# Altium PCB WatchX.PcbDoc
Units mil, origin at the board's own origin, x right, y up, seen from the top; angles counter-clockwise.
Board outline 1113.03 x 1633.03 mil, 2 copper layers (Top Layer, Bottom Layer); 65 components, 48 nets, 268 pads, 61 vias.
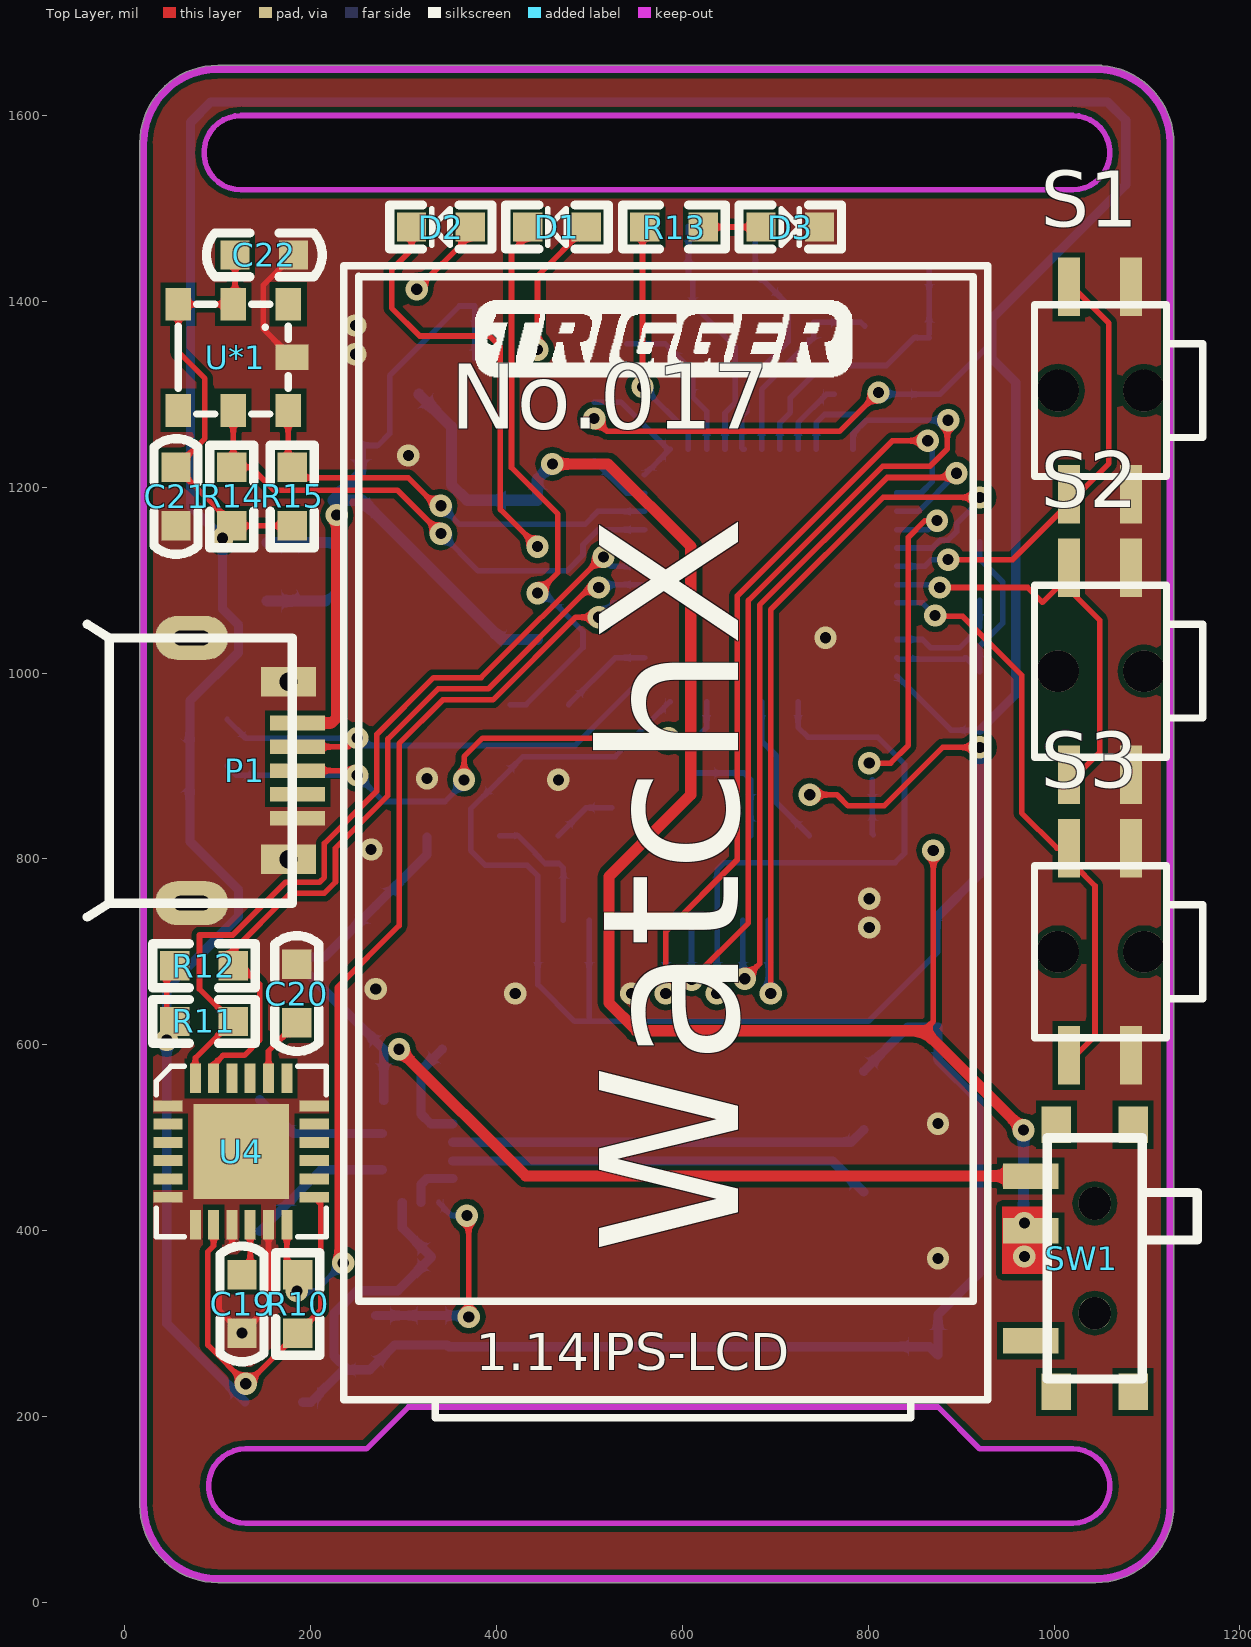
[diagram p0: Top Layer view]
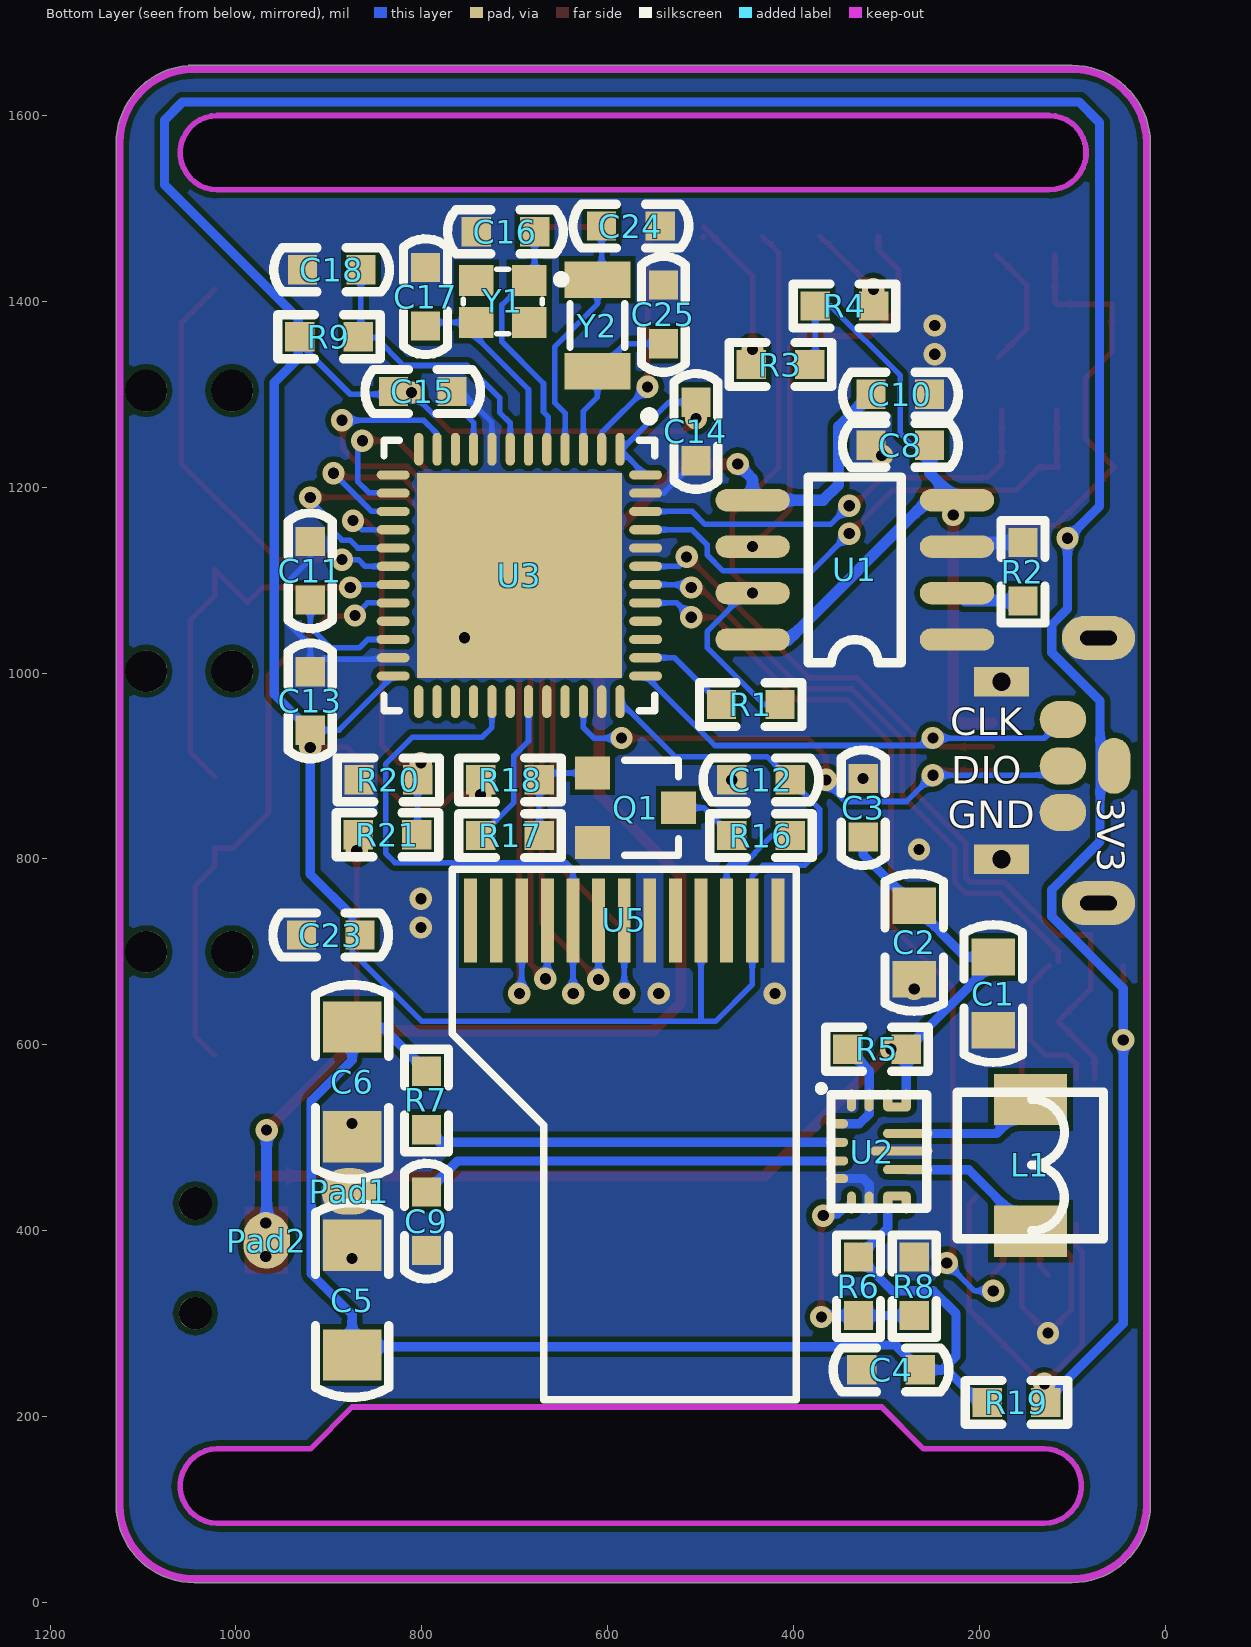
[diagram p1: Bottom Layer view, seen from below]
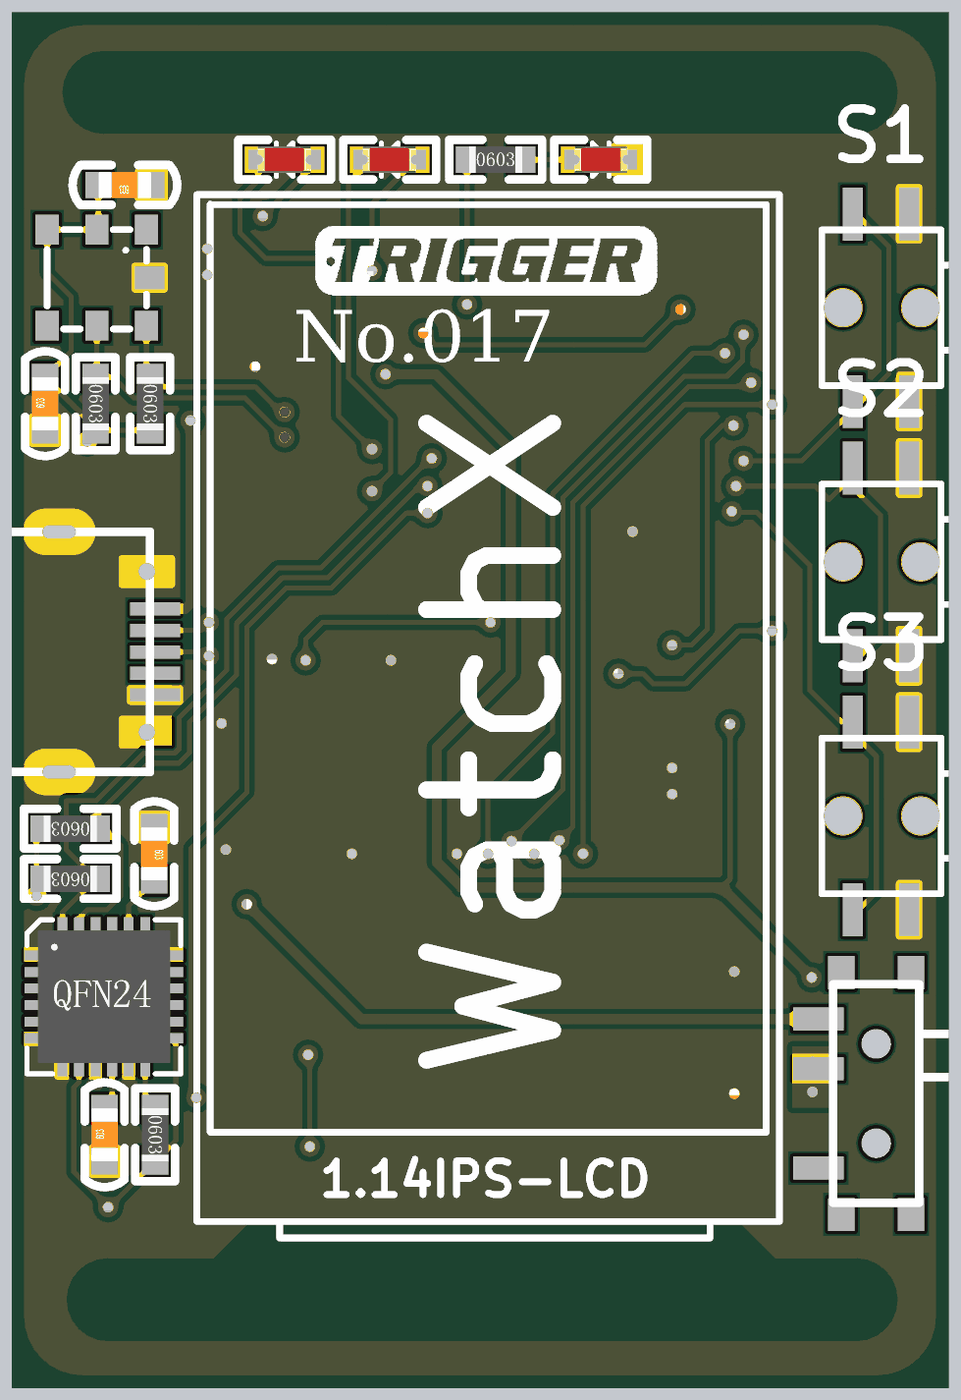
[diagram p2: 3D render of the assembled board from above, using the file's embedded part models]
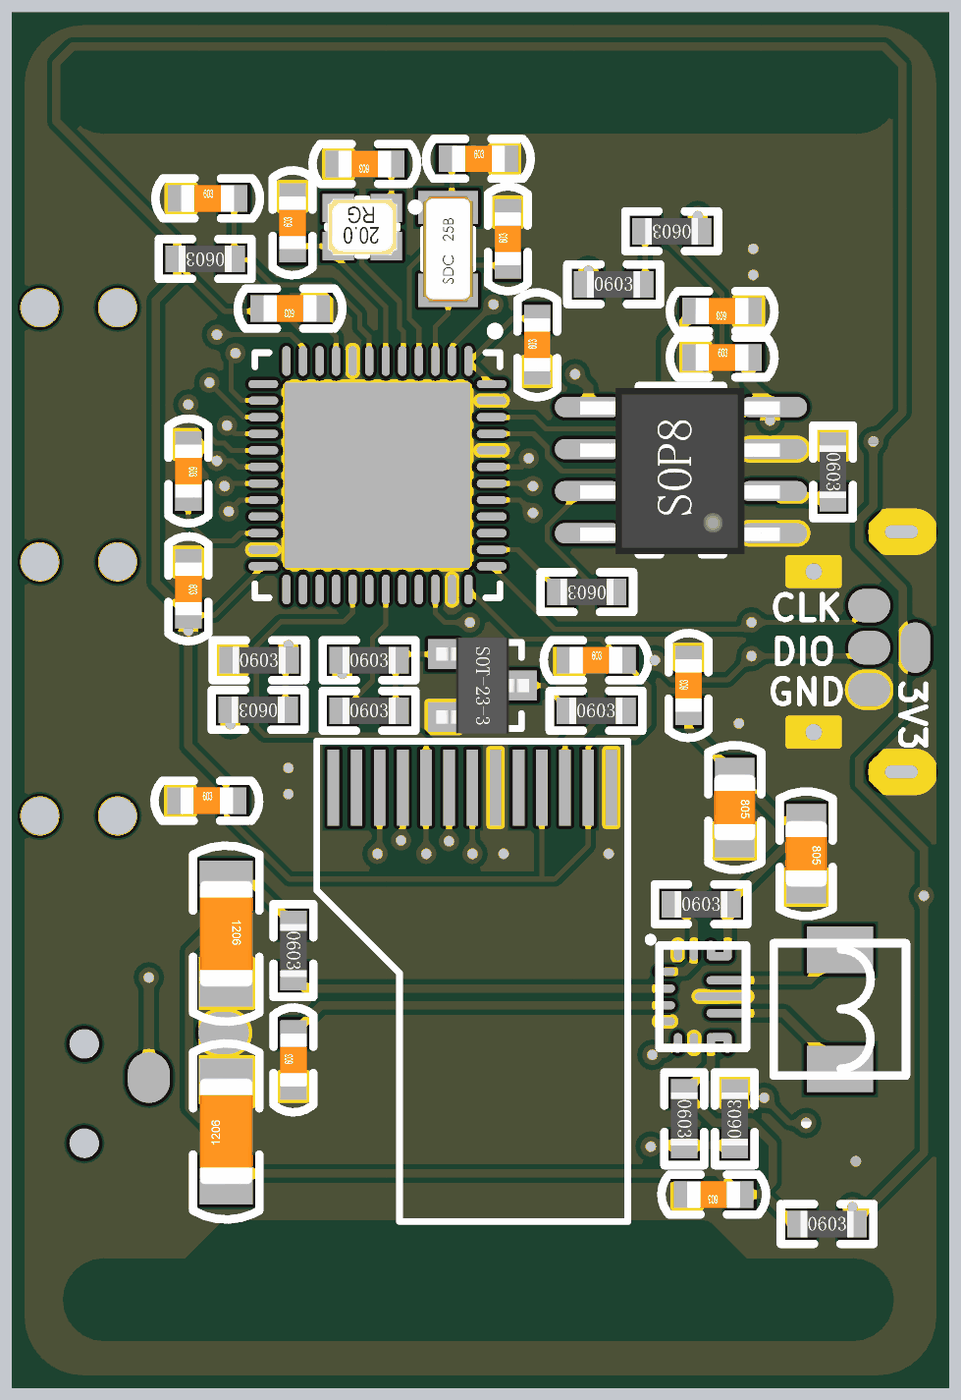
[diagram p3: 3D render of the assembled board from below, using the file's embedded part models]

## Layer stack, top to bottom
Top Solder: solder mask 0.4, Solder Resist, Dk 3.5
Top Layer: signal copper 1.4
Dielectric 1: dielectric 12.6, FR-4, Dk 4.8
Bottom Layer: signal copper 1.4
Bottom Solder: solder mask 0.4, Solder Resist, Dk 3.5

## Board outline
15.98,105 ccw(c100,105) 100,20.98 1045,20.98 ccw(c1045,105) 1129.02,105 1129.02,1575 ccw(c1125,1575) 1128.77,1576.37 ccw(c1045,1570) 1051.37,1653.77 ccw(c1050,1650) 1050,1654.01 100,1654.01 ccw(c100,1570) 15.98,1570
cut-out: 130,85 cw(c130,125) 130,165 260,165 305,210 875,210 920,165 1020,165 cw(c1020,125) 1020,85
cut-out: 125,1520 1020,1520 ccw(c1020,1560) 1020,1600 125,1600 ccw(c125,1560)
cut-out: 125,1520 1020,1520 ccw(c1020,1560) 1020,1600 125,1600 ccw(c125,1560)
cut-out: 130,85 cw(c130,125) 130,165 260,165 305,210 875,210 920,165 1020,165 cw(c1020,125) 1020,85

## Design rules (kind name [scope] priority, off if disabled: settings)
Clearance [All] p1: gap=6
ComponentClearance [All] p1 off: gap=10 collisioncheckmode=3 verticalgap=10 showdistances=FALSE
HoleSize [All] p1 off: absolutevalues=TRUE maxlimit=100 minlimit=1 maxpercent=80.000 minpercent=20.000
HoleToHoleClearance [All] p1 off: gap=10 allowstackedmicrovias=TRUE
LayerPairs [All] p1 off: enforce=TRUE
MinimumSolderMaskSliver [All] p1 off: minsoldermaskwidth=10
NetAntennae [All] p1 off: netantennaetolerance=0
PlaneConnect [All] p1: planeconnectstyle=Direct reliefexpansion=20 reliefentries=4 reliefconductorwidth=10 reliefairgap=10
PolygonConnect [All] p1: connectstyle=Direct reliefconductorwidth=10 reliefentries=4 polygonreliefangle="90 Angle" airgapwidth=10
RoutingVias [All] p1: holewidth=12 width=24 viastyle="Through Hole" minholewidth=12 minwidth=24 maxholewidth=12 maxwidth=24
SilkToSilkClearance [All] p1 off: silktosilkclearance=10
SilkToSolderMaskClearance [IsPad] p1 off: minsilkscreentomaskgap=10 clearancetoexposedcopper=TRUE
SolderMaskExpansion [All] p1: expansion=4
Width [All] p1: maxlimit=100 minlimit=6 preferedwidth=10
21 further rules are at their usual default settings.

## Components (designator, comment, footprint, x,y, rotation, side; value= is the part's Value field where it differs from the comment)
C1 "106" 电容_C0805 185,655 r270 bottom
C2 "106" 电容_C0805 270,710 r270 bottom
C3 "106" 电容_C0603 325,855 r90 bottom
C4 "106" 电容_C0603 295,250 r0 bottom
C5 "22uf" 电容_C1206 875,325 r90 bottom
C6 "22uf" 电容_C1206 875,560 r270 bottom
C8 "10uf" 电容_C0603 285,1245 r180 bottom
C9 "104" 电容_C0603 795,410 r90 bottom
C10 "10uf" 电容_C0603 285,1300 r0 bottom
C11 "4.7uF" 电容_C0603 920,1110 r270 bottom
C12 "1uF" 电容_C0603 435,885 r180 bottom
C13 "1uF" 电容_C0603 920,970 r270 bottom
C14 "1uF" 电容_C0603 505,1260 r90 bottom
C15 "1uF" 电容_C0603 799,1303 r0 bottom
C16 "22pf" 电容_C0603 710,1475 r0 bottom
C17 "22pf" 电容_C0603 796,1405 r90 bottom
C18 "104" 电容_C0603 897,1434 r180 bottom
C19 "104" 电容_C0603 126,321 r90 top
C20 "2.2nF" 电容_C0603 185,655 r270 top
C21 "4.7uf" 电容_C0603 55,1190 r90 top
C22 "104" 电容_C0603 150,1450 r180 top
C23 "105" 电容_C0603 898,718 r180 bottom
C24 "22pf" 电容_C0603 575,1481 r180 bottom
C25 "22pf" 电容_C0603 540,1386 r90 bottom
D1 "red" LED_0603 465,1480 r180 top
D2 "green" LED_0603 340,1480 r180 top
D3 "red" LED_0603 716,1480 r0 top
L1 "1.5uH" 变压器电感_0420 145,470 r0 bottom
P1 "MICRO USB" "接插件_MICRO 牛角插座 USB 卷边" 180,895 r90 top
Pad1 "GND" Pad_A 878,442 r180 bottom
Pad2 "BAT" Pad_A 967,389 r90 bottom
Q1 "S8050" 三极管_SOT-23 570,855 r270 bottom
R1 "2k" 电阻_R0603 446,966 r0 bottom
R2 "1.2k" 电阻_R0603 153,1109 r270 bottom
R3 "2k" 电阻_R0603 414,1332 r180 bottom
R4 "2k" 电阻_R0603 345,1395 r0 bottom
R5 "10K" 电阻_R0603 310,595 r180 bottom
R6 "470K" 电阻_R0603 330,340 r270 bottom
R7 "100k" 电阻_R0603 795,540 r270 bottom
R8 "150K" 电阻_R0603 270,340 r90 bottom
R9 "10K" 电阻_R0603 900,1362 r0 bottom
R10 "10K" 电阻_R0603 186,321 r270 top
R11 "10K" 电阻_R0603 85,625 r180 top
R12 "10K" 电阻_R0603 85,685 r180 top
R13 "1K" 电阻_R0603 591,1480 r0 top
R14 "4.7K" 电阻_R0603 115,1190 r270 top
R15 "4.7K" 电阻_R0603 180,1190 r270 top
R16 "10R" 电阻_R0603 435,825 r180 bottom
R17 "1K" 电阻_R0603 705,825 r180 bottom
R18 "10K" 电阻_R0603 705,885 r180 bottom
R19 "1R" 电阻_R0603 160,215 r180 bottom
R20 "10k" 电阻_R0603 836,885 r180 bottom
R21 "10k" 电阻_R0603 837,826 r0 bottom
S1 "SW-PB" KEY_3.5*4.7 1018,1304 r90 top
S2 "SW-PB" KEY_3.5*4.7 1018,1002 r90 top
S3 "SW-PB" KEY_3.5*4.7 1018,700 r90 top
SW1 "SPDT" MSS3-Q-T/R 1030,370 r90 top
U1 "TP4056" SOP8 225,1035 r0 bottom
U2 "TPS63070" VQFN-15-HR 315,485 r180 bottom
U3 "STM32F401CCU6" STM-UFQFPN48_N 695,1105 r270 bottom
U4 "MPU-6050" 陀螺仪_QFN24 125,485 r0 top
U5 "IPS-LCD" 1.14IPS-LCD -95,470 r270 top locked
U*1 "BMP180" LGA-7 215,1200 r0 top
Y1 "XTAL" 晶振_2016 713,1400 r0 bottom
Y2 "32.768K" 晶振_3215 611,1374 r90 bottom

## Footprints (in the part's own frame and the unit in brackets; to place one, negate y for a bottom-side part, rotate by r counter-clockwise, add the part's x,y. Pads: shape width x height; smd on the part's side, far side on the other; paste and mask are expansions set on the pad)
1.14IPS-LCD [mm] "1.14寸IPS-LCD裸屏SPI接口"
  rect 2.3x0.35 smd far side: 1(-6.7,21.4) 2(-6.7,20.7) 3(-6.7,20) 4(-6.7,19.3) 5(-6.7,18.6) 6(-6.7,17.9) 7(-6.7,17.2) 8(-6.7,16.5) 9(-6.7,15.8) 10(-6.7,15.1) 11(-6.7,14.4) 12(-6.7,13.7) 13(-6.7,13)
  silkscreen extent -24.6,8.4 6.9,26
KEY_3.5*4.7 [mil]
  round 45 hole 45: 0(0,13.78) 0(0,-78.74)
  rect 62.99x23.62 smd: 1(-111.5,-64.98) 1(111.5,-64.98) 2(-111.5,2.02) 2(111.5,2.02)
  silkscreen extent -92,-142 92,39, body extent -116,-142 117,35, height 64
LED_0603 [mm]
  rect 0.8x0.8 smd paste-0.1: A(-0.8,0) K(0.8,0)
  silkscreen extent -1.4,-0.6 1.4,0.6, body extent -0.8,-0.4 0.82,0.4, height 0.6
LGA-7 [mm] "LGA-7Pin"
  rect 0.7x0.9 smd: 1(-1,5) 2(-2.5,5) 3(-4,5) 4(-4,2.1) 5(-2.5,2.1) 6(-1,2.1)
  rect 0.9x0.7 smd: 7(-0.9,3.55)
  silkscreen extent -4,2 -1,5
MSS3-Q-T/R [mm] "贴片开关-两档"
  rect 1x0.8 smd: 0(-3.65,-1.4) 0(-3.65,0.7) 0(3.65,-1.4) 0(3.65,0.7)
  rect 0.7x1.524 smd: 1(-2.25,1.4) 2(0.75,1.4) 3(2.25,1.4)
  round 0.9 hole 0.9 unplated: ""(-1.5,-0.35) ""(1.5,-0.35)
  silkscreen extent -3.3,-3.15 3.3,0.95
Pad_A [mil]
  oval 60x50 smd: 1(0,0)
SOP8 [mil]
  oval 80x24 smd: 1(-1,-1) 2(-1,-51) 3(-1,-101) 4(-1,-151) 5(219,-151) 6(219,-101) 7(219,-51) 8(219,-1)
  silkscreen extent 59,-176 159,24, body extent -9,-174 229,24, height 63
STM-UFQFPN48_N [mm] "QFN, 48-Leads, Body 7.1x7.1mm, Pitch 0.5mm, Thermal Pad 5.6x5.6mm, IPC Medium Density"
  oval 0.9x0.25 smd: 1(-3.45,2.75) 2(-3.45,2.25) 3(-3.45,1.75) 4(-3.45,1.25) 5(-3.45,0.75) 6(-3.45,0.25) 7(-3.45,-0.25) 8(-3.45,-0.75) 9(-3.45,-1.25) 10(-3.45,-1.75) 11(-3.45,-2.25) 12(-3.45,-2.75) 25(3.45,-2.75) 26(3.45,-2.25) 27(3.45,-1.75) 28(3.45,-1.25) 29(3.45,-0.75) 30(3.45,-0.25) 31(3.45,0.25) 32(3.45,0.75) 33(3.45,1.25) 34(3.45,1.75) 35(3.45,2.25) 36(3.45,2.75)
  oval 0.25x0.9 smd: 13(-2.75,-3.45) 14(-2.25,-3.45) 15(-1.75,-3.45) 16(-1.25,-3.45) 17(-0.75,-3.45) 18(-0.25,-3.45) 19(0.25,-3.45) 20(0.75,-3.45) 21(1.25,-3.45) 22(1.75,-3.45) 23(2.25,-3.45) 24(2.75,-3.45) 37(2.75,3.45) 38(2.25,3.45) 39(1.75,3.45) 40(1.25,3.45) 41(0.75,3.45) 42(0.25,3.45) 43(-0.25,3.45) 44(-0.75,3.45) 45(-1.25,3.45) 46(-1.75,3.45) 47(-2.25,3.45) 48(-2.75,3.45)
  rect 5.6x5.6 smd: 49(0,0)
  silkscreen extent -4.47,-3.7 3.7,3.7, body extent -3.55,-3.55 3.55,3.55, height 0.6
VQFN-15-HR [mm] "VQFN"
  oval 0.599x0.25 smd: 1(-0.964,0.759) 2(-0.964,0.251) 3(-0.964,-0.257) 4(-0.964,-0.739)
  oval 0.25x0.599 smd: 5(-0.573,-1.394) 6(-0.09,-1.394) 7(0.418,-1.394) 7(0.926,-1.394) 12(0.418,1.394) 12(0.926,1.394) 14(-0.09,1.394) 15(-0.573,1.394)
  oval 0.75x0.25 smd: 7(0.672,-1.217) 12(0.679,1.222)
  oval 1.349x0.25 smd: 9(0.964,-0.495) 11(0.964,0.495)
  oval 1.7x0.25 smd: 10(0.789,0.013)
  silkscreen extent -1.45,-1.55 1.48,1.78
三极管_SOT-23 [mm]
  rect 0.9x0.95 smd: 1(-0.95,-1.175) 2(0,1.175) 3(0.95,-1.175)
  silkscreen extent -1.3,-0.3 1.3,1.18, body extent -1.45,-1.4 1.45,1.4, height 1.2
变压器电感_0420 [mm]
  rect 2x1.4 smd: 1(0,-1.8) 2(0,1.8)
  silkscreen extent -2,-2 2,2
"接插件_MICRO 牛角插座 USB 卷边" [mm]
  oval 1.2x2 hole 0.4 slot 1 at 90 deg: 0(-3.625,2.75) 0(3.625,2.75)
  rect 0.8x1.5 hole 0.5: 0(-2.425,0.1) 0(2.425,0.1)
  rect 0.4x1.5 smd: 1(1.3,-0.15) 2(0.65,-0.15) 3(0,-0.15) 4(-0.65,-0.15) 5(-1.3,-0.15)
  silkscreen extent -4,0 4,5.6
晶振_2016 [mm]
  rect 0.95x0.85 smd: 0(-0.725,0.575) 0(0.725,-0.575) 1(-0.725,-0.575) 2(0.725,0.575)
  silkscreen extent -1.7,-0.88 1.08,0.88, body extent -1.05,-0.85 1.05,0.85, height 0.56
晶振_3215 [mm] "XTAL SMD 3.2 x 1.5 mm"
  rect 1x1.8 smd: 1(-1.25,0) 2(1.25,0)
  silkscreen extent -0.6,-0.75 0.6,0.75, body extent -1.6,-0.75 1.6,0.75, height 0.81
电容_C0603 [mm]
  rect 0.8x0.8 smd: 1(-0.8,0) 2(0.8,0)
  silkscreen extent -1.58,-0.6 1.58,0.6, body extent -0.8,-0.4 0.8,0.4, height 0.3
电容_C0805 [mm]
  rect 1x1.2 smd: 1(-1,0) 2(1,0)
  silkscreen extent -1.88,-0.8 1.88,0.8, body extent -1,-0.62 1,0.63, height 0.77
电容_C1206 [mm]
  rect 1.4x1.6 smd: 1(-1.5,0) 2(1.5,0)
  silkscreen extent -2.66,-1 2.66,1, body extent -1.6,-0.8 1.6,0.8, height 1
电阻_R0603 [mm]
  rect 0.8x0.8 smd: 1(-0.8,0) 2(0.8,0)
  silkscreen extent -1.4,-0.6 1.4,0.6, body extent -0.8,-0.4 0.8,0.4, height 0.45
陀螺仪_QFN24 [mm]
  rect 2.6x2.6 smd: 0(0.005,0)
  rect 0.8x0.3 smd: 1(-2,1.25) 2(-2,0.75) 3(-2,0.25) 4(-2,-0.25) 5(-2,-0.75) 6(-2,-1.25) 13(2,-1.25) 14(2,-0.75) 15(2,-0.25) 16(2,0.25) 17(2,0.75) 18(2,1.25)
  rect 0.3x0.8 smd: 7(-1.25,-2) 8(-0.75,-2) 9(-0.25,-2) 10(0.25,-2) 11(0.75,-2) 12(1.25,-2) 19(1.25,2) 20(0.75,2) 21(0.25,2) 22(-0.25,2) 23(-0.75,2) 24(-1.25,2)
  silkscreen extent -2.32,-2.32 2.32,2.32, body extent -2,-2 2.01,2, height 0.9

## Part data
C1 C2 C3 C4 C5 C6 C8 C9 C10 C11 C12 C13 C14 C15 C16 C17 C18 C19 C20 C21 C22 C23 C24 C25: library part cap
D1 D2 D3: library part LED
L1: library part "Inductor Iron 2"
P1: library part "MICRO USB 5PIN"
Pad1 Pad2: library part Pad
Q1: library part Triode-NPN
R1 R2 R3 R4 R5 R6 R7 R8 R9 R10 R11 R12 R13 R14 R15 R16 R17 R18 R19 R20 R21: library part Res
S1 S2 S3: "按键"
SW1: library part SW_SPDT, "开关-两档"
U2: "降压-升压转换器"
U3: "ARM Cortex-M4 32-bit MCU+FPU, 105 DMIPS, 256 kB Flash, 64 kB Internal RAM, 36 I/Os, 48-pin UFQFPN, -40 to 85 degC, Tray"
U5: library part IPS-LCD-1.14, "IPS-LCD-1.14寸裸屏spi接口"
U*1: "数字气压传感器"
Y2: library part XTAL_A

## Free pads (board coordinates)
  oval 50x40 smd far side: 2(110,950) 3(110,900) 4(110,850)
  oval 35x60 smd far side: 5(55,900)

## Via types
v1: diameter 24, hole 12, Top Layer to Bottom Layer, tented both sides, 61 vias

## Nets (pads, with @x,y where several pads share a name; then routed paths per layer and width w, separated by ;. In a path a pad name is that pad's centre, name@x,y a point inside that pad or via, vN(x,y) a via of type N, cw(c..) or ccw(c..) an arc to the next point about the centre after c; other vN are vias at no path point)
3V3: C12.2 C13.2 C14.2 C15.2 C21.2 C22.2 C23.2 pad.5 R9.2 R10.2 R11.2 R12.2 R14.2 R15.2 R18.1 R19.2 U3.1 U3.9 U3.24 U3.36 U3.48 U4.8 U4.13 U5.10 U5.12 U*1.2 U*1.3 | length 6597.2
  Top Layer w6: 45,641.5 R12.2@45,685 ; U4.8 95.47,383.47 89.25,377.25 89.25,276.75 131,235 131.5,235 R10.2 210.75,314.25 210.75,428.78 U4.13 ; C22.2 118.5,1398.78 U*1.2 U*1.3 57.52,1345.48 86,1317 86,1252.5 C21.2 115,1161.5 R14.2 R15.2 ; v1(505,1274) 519,1260 769,1260 v1(811,1302) ; v1(737,869) 766.3,869 778.3,857 817,857 880,920 v1(920,920)
  Bottom Layer w6: U5.10 499.49,625.49 499,625 ; C14.2 533.81,1291.5 584.47,1240.83 U3.1 U3.48 ; U3.36 527.56,910 428.5,910 C12.2 372,853.5 372,809 388,793 433,793 444.37,781.63 U5.12 444.37,664.63 484,625 499,625 ; U3.9 744.21,1269.46 753,1278.25 787.25,1278.25 809,1300 877,1300 R9.2@933,1356 ; U3.24 889.06,938.5 C13.2 ; 875,738.5 875,700 800,625 499,625
  Bottom Layer w10: R19.2@129.25,215.75 45,300 v1(45,605) 45,660.84 122.1,737.94 122.1,766.62 70,818.73 70,970 122.1,1022.1 122.1,1052.06 105,1069.16 v1(105,1145) 70.53,1179.47 70.53,1592.53 92.47,1614.47 1057.53,1614.47 1077,1595 1077,1525.5 933,1381.5 933,1338.5 958.75,1312.75 958.75,977.25 C13.2 ; 875,738.5 920,783.5 v1(920,920)
  other v1: 130,235
BAT: C10.2 Pad2.1 R21.2 SW1.2 U1.5 | length 1790.8
  Top Layer w6: 860,615 870,625 v1(870,809)
  Top Layer w12: v1(460,1225) 520,1225 609,1136 609,869 521,781 521,645.06 550,616.06 550,615 860,615 v1(967,508)
  Bottom Layer w12: C10.2 351.5,1265 351.5,1202.5 368,1186 U1.5 444,1209 v1(460,1225) ; Pad2.1 v1(967,508)
  other v1: 968,372 968,408
BAT_CHG: R1.2 U3.38 | length 102.6
  Bottom Layer w6: R1.2 527.91,1016.42 U3.38
BAT_DET: R20.2 R21.1 U3.16 | length 419
  Top Layer w6: v1(801,903) 824,903 843,922 843,1146 861,1164 v1(874,1164)
  Bottom Layer w6: R20.2 804.5,827 R21.1 ; U3.16 864.21,1154.21 v1(874,1164)
BAT_SW: C1.1 C2.1 C3.1 R5.2 SW1.3 U2.12 | length 1134.3
  Top Layer w12: v1(295,595) 431.42,458.58 SW1.3
  Bottom Layer w10: U2.12@278.55,539.9 278.5,539.95 R5.2 185,688.5 C1.1 215,694.37 C2.1 325,804.37 C3.1
BMP180_SCL: R14.1 U3.45 U*1.5 | length 569.7
  Top Layer w6: U*1.5 116.57,1223.07 R14.1 135.78,1221.5 160.52,1196.75 293.25,1196.75 v1@335,1155
  Bottom Layer w6: v1(340,1150) 380,1110 475.7,1110 493,1127.3 493,1138 509.21,1154.21 U3.45
BMP180_SDA: R15.1 U3.46 U*1.6 | length 461.3
  Top Layer w6: U*1.6 175.63,1225.87 R15.1 191.5,1210 305,1210 v1@330,1185
  Bottom Layer w6: v1(340,1180) 360,1160 495,1160 508.9,1173.9 U3.46
CPOUT: C20.2 U4.20 | length 72.4
  Top Layer w6: U4.20 154.53,593.03 C20.2
GND: C1.2 C2.2 C3.2 C4.2 C5.2 C6.2 C8.1 C9.1 C10.1 C11.1 C12.1 C13.1 C14.1 C15.1 C16.2 C17.2 C18.1 C19.1 C20.1 C21.1 C22.1 C23.1 C24.2 C25.2 D3.K P1.0 P1.5 Pad1.1 pad.4 Q1.3 R2.1 R8.2 R20.1 S1.1 S2.1 S3.1 U1.1 U1.3 U2.4 U2.6 U2.10 U2.15 U3.8 U3.23 U3.35 U3.44 U3.47 U3.49 U4.0 U4.1 U4.6 U4.7 U4.9 U4.11 U4.18 U5.8 U5.13 U*1.7 | length 933
  Top Layer w6: U4.9 115.16,385.88 101.25,371.97 101.25,314.25 v1(126,289.5) 154.53,318.03 U4.11 ; U*1.7 149,1370.33 149,1417.5 C22.1
  Bottom Layer w6: U1.3@219.5,1140.5 U1.3 ; C14.1 539.92,1193.58 U3.47 ; U3.8 724.53,1269.53 755,1300 C15.1@763.5,1300 ; U3.23 832.24,1015 902.97,1015 904.39,1016.42 905.08,1016.42 C13.1 920,1029.01 944.75,1053.76 944.75,1097.98 920,1122.73 C11.1
  Bottom Layer w10: U2.6 318.55,449.55 324.9,455.9 U2.4
  Bottom Layer w12: R2.1 U1.3@219.5,1140.5
  other v1: 875,370 875,515 420,655 545,655 270,660 801,726 801,757 265,810 466.5,885 325,886.5 754,1038 305,1234 248,1343 248,1374
KEY1: S1.2 U3.18 | length 475.9
  Top Layer w6: v1(886,1122) 955.48,1122 1059,1225.52 1059,1376.48 S1.2@1022.98,1412.5
  Bottom Layer w6: U3.18 860.84,1114.84 868,1122 v1(886,1122)
KEY2: S2.2 U3.19 | length 465
  Top Layer w6: v1(877,1092) 971.48,1092 987.48,1076 1022.98,1111.5 1022.98,1082.98 1049,1056.96 1049,914.52 S2.2@1022.98,888.5
  Bottom Layer w6: U3.19 875.16,1095.16 v1@877.85,1097.85 ; v1(877,1092) v1@877,1097
KEY3: S3.2 U3.20 | length 628.7
  Top Layer w6: v1(872,1062) 873,1061 901.7,1061 965,997.7 965,849.48 1002.98,811.5 1022.98,811.5 1022.98,791.98 1044,770.96 1044,609.52 S3.2@1022.98,588.5
  Bottom Layer w6: U3.20 858.53,1075.47 v1(872,1062)
LED: R13.1 U3.2 | length 260.9
  Top Layer w6: R13.1@554,1480 557,1477 v1(557,1308)
  Bottom Layer w6: v1(557,1308) 606.42,1258.58 U3.2
MPU6050_INT: R10.1 U3.41 U4.12 | length 1037.2
  Top Layer w6: U4.12 174.21,364.28 R10.1 ; v1(235,365) 228.49,371.51 228.49,661.55 295,728.06 295,924 342,971 396,971 485,1060 v1(510,1060)
  Bottom Layer w6: v1(185,335) 205,335 v1(235,365) ; v1(510,1060) 525.47,1075.47 U3.41
MPU6050_SCL: R12.1 U3.42 U4.23 | length 838.5
  Top Layer w6: U4.23 95.47,578.44 105.52,588.49 128.49,588.49 145,605 145,665 R12.1@125,685 ; R12.1@115,690 115,700 177.78,762.78 214.29,762.78 226.59,775.08 226.59,811.59 283,868 283,928.97 337.03,983 391.03,983 500.03,1092 v1(510,1092)
  Bottom Layer w6: v1(510,1092) 513.16,1095.16 U3.42
MPU6050_SDA: R11.1 U3.43 U4.24 | length 894.9
  Top Layer w6: U4.24 75.79,585.79 115,625 80.27,659.73 80.27,718 116.03,718 172.81,774.78 209.32,774.78 214.59,780.05 214.59,816.56 271,872.97 271,933.94 332.06,995 383.3,995 513.3,1125 v1(515,1125)
  Bottom Layer w6: v1(515,1125) 515,1123 523.16,1114.84 U3.43
NetC4_1: C4.1 C5.1 C6.1 R6.1 R7.1 R19.1 U2.7 | length 1471.5
  Bottom Layer w10: R19.1 200,215 235,250 240,250 ; U2.7@298.55,430.1 298.55,402.95 R6.1 293.76,335.25 249.7,335.25 225,310.56 225,265 240,250 ; R7.1 842.56,619.06 C6.1 875,583.5 919,539.5 919,353.44 875,309.44 C5.1 865.94,275 348.55,275 346.8,276.75 290.25,276.75 C4.1 240,250
NetC9_2: C9.2 U2.3 | length 455.9
  Bottom Layer w10: U2.3 761.6,474.9 C9.2
NetD1_A: D1.A R3.1 | length 155.9
  Top Layer w6: v1(444,1348) 444,1427.5 D1.A ; D1.A@496.5,1470 D1.A@498,1468.5
NetD1_K: D1.K R1.1 U1.7 | length 608.5
  Top Layer w6: D1.K@433.5,1470 416,1452.5 416,1221 466,1171 466,1108 v1(444,1086)
  Bottom Layer w6: R1.1 431.7,966 493,1027.3 493,1044.7 451.7,1086 v1(444,1086)
NetD2_A: D2.A R4.1 | length 81.1
  Top Layer w6: v1(314,1413) 371,1470 D2.A@371.5,1470
NetD2_K: D2.K U1.6 | length 451.9
  Top Layer w6: D2.K@308.5,1470 308.5,1455.5 287,1434 287,1393 317.25,1362.75 392.25,1362.75 404,1351 404,1176 v1(444,1136)
NetD3_A: D3.A R13.2 | length 62
  Top Layer w6: R13.2 D3.A
NetL1_1: L1.1 U2.11 | length 147.1
  Bottom Layer w10: L1.1 181.37,504.5 U2.11
NetL1_2: L1.2 U2.9 | length 159.5
  Bottom Layer w10: L1.2 211.37,465.5 U2.9
NetQ1_1: Q1.1 R17.2 R18.2 | length 120.3
  Bottom Layer w6: Q1.1 666.1,892.4 R18.2 R17.2
NetQ1_2: Q1.2 R16.1 | length 69.7
  Bottom Layer w6: R16.1 496.5,855 Q1.2
NetR2_2: R2.2 U1.2 | length 74.5
  Bottom Layer w6: U1.2@215.5,1077.5 U1.2
  Bottom Layer w12: R2.2 U1.2@215.5,1077.5
NetR5_1: R5.1 U2.1 U2.14 | length 117.8
  Bottom Layer w10: R5.1 318.55,572.05 U2.14 318.55,525.45 329.1,514.9 U2.1
NetR6_2: R6.2 R8.1 U2.5 | length 246.7
  Top Layer w6: v1(368,416) 370,414 v1(370,307)
  Bottom Layer w6: U2.5 351.65,416 v1(368,416)
  Bottom Layer w10: R8.1 R6.2 368.5,308.5 v1(370,307)
NetR7_2: R7.2 U2.2 | length 447.7
  Bottom Layer w10: U2.2 781.4,494.9 R7.2
OSC32_IN: C25.1 U3.3 Y2.1 | length 173.5
  Bottom Layer w6: C25.1 581.28,1354.5 Y2.1 611,1297 626.1,1281.9 U3.3
OSC32_OUT: C24.1 U3.4 Y2.2 | length 265.7
  Bottom Layer w6: C24.1 606.5,1427.72 Y2.2 611,1397 657,1351 657,1291 645.79,1279.79 U3.4
OSC_IN: C16.1 U3.5 Y1.1 | length 273
  Bottom Layer w6: U3.5@666.56,1240.83 U3.5 664,1242.3 664,1276 669,1281 669,1311.59 714,1356.59 713.84,1356.74 713.84,1396.14 687.34,1422.64 Y1.1 678.5,1428.59 C16.1
OSC_OUT: C17.1 U3.6 Y1.2 | length 215.9
  Bottom Layer w6: U3.6 685.16,1305.16 741.54,1361.54 Y1.2 792.14,1377.36 C17.1
REGOUT: C19.2 U4.10 | length 57.4
  Top Layer w6: C19.2 134.84,361.34 U4.10
RST: C18.2 R9.1 U3.7 | length 305.2
  Bottom Layer w6: U3.7 704.84,1269.12 716.24,1280.52 716.24,1296.24 751,1331 819.5,1331 849.5,1361 R9.1@865.5,1361 ; R9.1@865.5,1365 C18.2
SWCLK: P1.2 pad.2 U3.37 | length 559.7
  Top Layer w6: P1.2 240.59,920.59 v1(250,930)
  Bottom Layer w6: pad.2 130,930 v1(250,930) 258,922 484.44,922 U3.37
SWDIO: P1.3 pad.3 U3.34 | length 675.3
  Top Layer w6: P1.3 245,895 v1(250,890) ; v1(365,885) 365,910 385,930 v1(585,930)
  Bottom Layer w6: pad.3 120,890 v1(250,890) 278.25,861.75 344.48,861.75 365,882.27 v1(365,885) ; v1(585,930) 615,930 626.1,941.1 U3.34
TFT_BLK: R17.1 U3.31 | length 165.4
  Bottom Layer w6: U3.31 685.16,926.84 701,911 701,860.5 R17.1
TFT_CS: U3.14 U5.7 | length 902.6
  Top Layer w6: v1(582,655) 582,722 659,799 659,1083 826,1250 v1(864,1250)
  Bottom Layer w6: v1(582,655) 582.17,655.17 U5.7 ; U3.14 830.83,1194 857.03,1194 869,1205.97 869,1245 v1(864,1250)
TFT_DC: U3.29 U5.5 | length 597
  Bottom Layer w6: v1(637,655) 637.28,655.28 U5.5 637.28,788.28 645,796 829,796 839,806 839,902 810,931 735,931 724.53,941.47 U3.29
TFT_LEDK: R16.2 U5.11 | length 139.6
  Bottom Layer w6: R16.2 423,825 441.75,806.25 441.75,805.52 452.27,795 467,795 471.93,790.07 U5.11
TFT_RES: U3.11 U5.6 | length 935.1
  Top Layer w6: v1(610,670) 671,731 671,1078.03 815.43,1222.46 866.16,1222.46 885,1241.3 885,1271 v1(886,1272)
  Bottom Layer w6: U5.6 609.72,670.28 v1(610,670) ; U3.11 783.58,1257.58 798,1272 v1(886,1272)
TFT_SCL: U3.15 U5.4 | length 824.4
  Top Layer w6: v1(667,671) 683,687 683,1073.06 820.4,1210.46 890.46,1210.46 v1(895,1215)
  Bottom Layer w6: U5.4 664.84,673.16 v1(667,671) ; U3.15 853.9,1173.9 v1(895,1215)
TFT_SDA: U3.17 U5.3 | length 886.8
  Top Layer w6: v1(695,655) 695,1068.09 815.91,1189 v1(920,1189)
  Bottom Layer w6: U5.3 692.4,657.6 v1(695,655) ; U3.17 868.83,1134.53 877.3,1143 886,1143 895.25,1152.25 895.25,1160.97 920,1185.72 v1(920,1189)
USB_VCC: C8.2 P1.1 R3.2 R4.2 U1.4 U1.8 | length 894.5
  Top Layer w12: P1.1 222.18,946.18 228,952 v1(228,1170)
  Bottom Layer w6: C8.2 272.27,1245 285,1257.73 285,1320 360,1395 R4.2 R3.2@376.5,1338.01
  Bottom Layer w12: C8.2 253.5,1215.5 U1.4 255,1186 405,1036 U1.8
VCAP_1: C11.2 U3.22 | length 131.6
  Bottom Layer w6: U3.22 858.2,1036.1 867.3,1027 898,1027 920,1049 C11.2
pads on no net: P1.4 S1.0 S2.0 S3.0 SW1. SW1.0 SW1.1 U3.10 U3.12 U3.13 U3.21 U3.25 U3.26 U3.27 U3.28 U3.30 U3.32 U3.33 U3.39 U3.40 U4.2 U4.3 U4.4 U4.5 U4.14 U4.15 U4.16 U4.17 U4.19 U4.21 U4.22 U5.1 U5.2 U5.9 U*1.1 U*1.4 Y1.0

## Polygon pours and split planes (outlines as drawn)
GND on Bottom Layer "GND" (solid, remove dead copper, pour order 2): 0,1650 1125,1650 1125,25 0,25
GND on Top Layer "GND" (solid, remove dead copper, pour order 4): 0,1650 1125,1650 1125,25 0,25

## Keep-outs
Keep-Out Layer:
  lines w6: 125,1520 cw(c125,1560) 125,1600 1020,1600 cw(c1020,1560) 1020,1520 125,1520 ; 130,85 cw(c130,125) 130,165 260,165 305,210 875,210 920,165 1020,165 cw(c1020,125) 1020,85 130,85
  lines w8: 1045,1650 cw(c1045,1570) 1125,1570 ; 1050,1650 100,1650 ccw(c100,1570) 20,1570 20,105 ccw(c100,105) 100,25 1045,25 ccw(c1045,105) 1125,105 1125,1575

## Other copper
Top Layer:
  rectangle net BAT: 944,353 991,426

## Silkscreen, mask and mechanical layers (free items; w line width, h text height)
Top Overlay:
  drawing of 583 lines, arcs and shapes, not listed
  text "No.017" at 350,1240 h120
  text "WatchX" at 660,375 h150 r90
Bottom Overlay:
  text "CLK" at 231.18,933 h30
  text "DIO" at 230.19,880.82 h30
  text "3V3" at 73,865 h30 r90
  text "GND" at 234,833 h30
Mechanical 1:
  lines w6: 125,1520 cw(c125,1560) 125,1600 1020,1600 cw(c1020,1560) 1020,1520 125,1520 ; 130,85 cw(c130,125) 130,165 260,165 305,210 875,210 920,165 1020,165 cw(c1020,125) 1020,85 130,85
  lines w8: 1045,1650 cw(c1045,1570) 1125,1570 ; 1050,1650 100,1650 ccw(c100,1570) 20,1570 20,105 ccw(c100,105) 100,25 1045,25 ccw(c1045,105) 1125,105 1125,1575

## Text inside footprints (layer, text, board x,y; h text height)
U5: Top Overlay "1.14IPS-LCD" at 377.44,249.53 h40